# Altium PCB 2AM.PcbDoc
Units mm, origin at the board's own origin, x right, y up, seen from the top; angles counter-clockwise.
Board outline 55 x 105 mm, 2 copper layers (Top Layer, Bottom Layer); 52 components, 28 nets, 124 pads, 0 vias.
Unrouted connection lines stored in the file: 90.
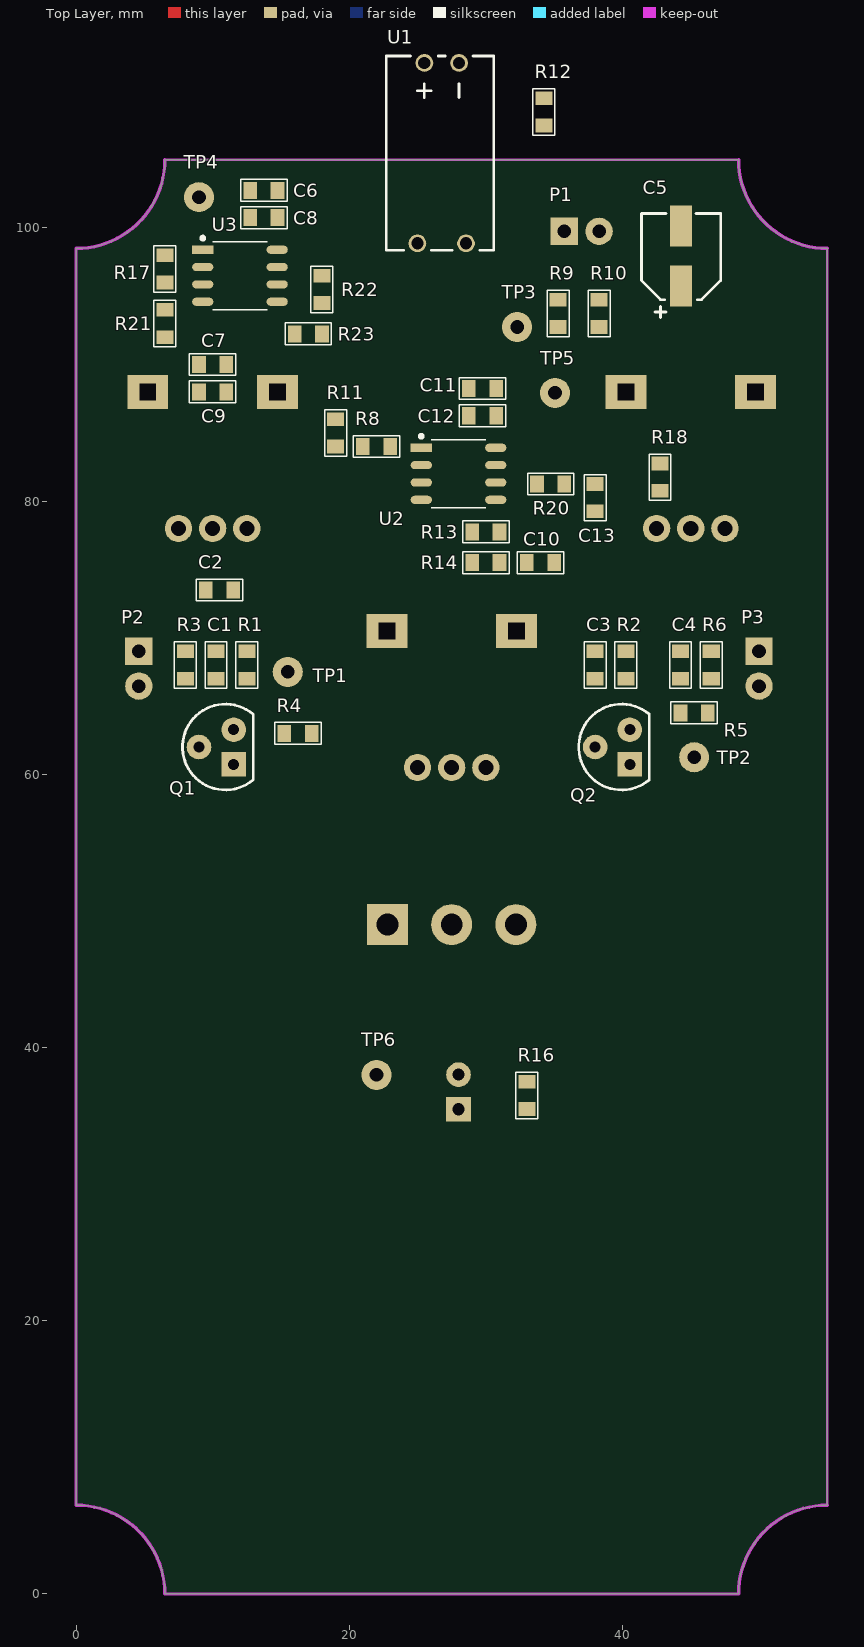
[diagram p0: Top Layer view]
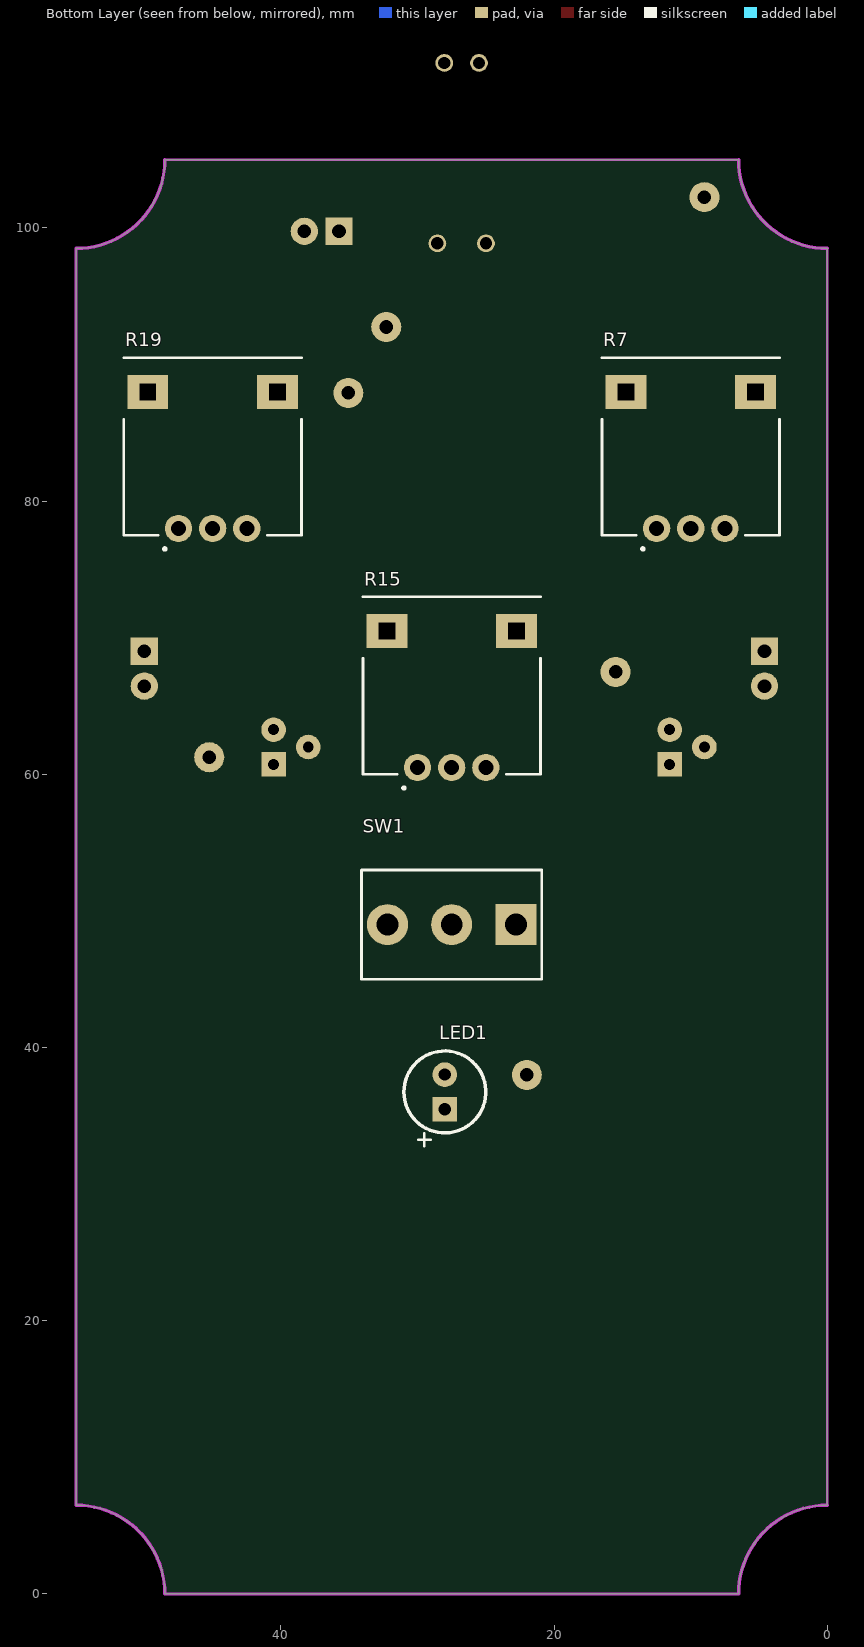
[diagram p1: Bottom Layer view, seen from below]

## Layer stack, top to bottom
Top Solder: solder mask 0.0102, Solder Resist, Dk 3.5
Top Layer: signal copper 0.0356
Dielectric 1: dielectric 0.32, FR-4, Dk 4.8
Bottom Layer: signal copper 0.0356
Bottom Solder: solder mask 0.0102, Solder Resist, Dk 3.5

## Board outline
0,6.5 cw(c0,0) 6.5,0 48.5,0 cw(c55,0) 55,6.5 55,98.5 cw(c55,105) 48.5,105 6.5,105 cw(c0,105) 0,98.5

## Design rules (kind name [scope] priority, off if disabled: settings)
Clearance [All] p1: gap=0.254 ignorepadtopadclearanceinfootprint=FALSE except(0: Arc-Hole Track-Hole SMDPad-Hole THPad-Hole Via-Hole Fill-Hole Poly-Hole Region-Hole Text-Hole)
Height [All] p1: minheight=0 maxheight=50 prefheight=12.7
PolygonConnect [All] p1: connectstyle=Relief reliefconductorwidth=0.254 reliefentries=4 polygonreliefangle="90 Angle" airgapwidth=0.254
RoutingVias [All] p1: holewidth=0.711 width=1.27 viastyle="Through Hole" minholewidth=0.711 minwidth=1.27 maxholewidth=0.711 maxwidth=1.27
SolderMaskExpansion [All] p1: expansion=0.102 istentingtop=FALSE
Width [All] p1: maxlimit=0.254 minlimit=0.254 preferedwidth=0.254
29 further rules are at their usual default settings.

## Components (designator, comment, footprint, x,y, rotation, side; value= is the part's Value field where it differs from the comment)
C1 "TH, cap" "0805, cap" 10.25,69 r270 top value=100n
C2 "TH, cap" "0805, cap" 9.5,73.5 r0 top value=1u
C3 "TH, cap" "0805, cap" 38,69 r270 top value=100n
C4 "TH, cap" "0805, cap" 44.25,67 r90 top value=100n
C5 "Capacitor, TH 2mm" "Cap, SMD, Polar, 5.3x5.3mm" 44.29,97.95 r180 top value=47u
C6 "TH, cap" "0805, cap" 12.75,102.75 r0 top value=1u
C7 "TH, cap" "0805, cap" 9,90 r0 top value=1u
C8 "TH, cap" "0805, cap" 12.75,100.75 r0 top value=100n
C9 "TH, cap" "0805, cap" 9,88 r0 top value=100n
C10 "TH, cap" "0805, cap" 35,75.5 r180 top value=100n
C11 "TH, cap" "0805, cap" 28.75,88.25 r0 top value=1u
C12 "TH, cap" "0805, cap" 28.75,86.25 r0 top value=100n
C13 "TH, cap" "0805, cap" 38,79.25 r90 top value=100n
LED1 "0805, LED" LED_Radial_5mm 28,36.75 r90 bottom value="0805 LED"
P1 "1x2 Pin Header" padtwo_L 35.75,99.75 r90 top
P2 "1x2 Pin Header" padtwo_L 4.6,69 r0 top
P3 "1x2 Pin Header" padtwo_L 50,69 r0 top
Q1 "BC547" BC547_TO-92_BENT 10.27,62 r180 top
Q2 "BC547" BC547_TO-92_BENT 39.27,62 r180 top
R1 "TH, resistor" 0805#1 12.5,69 r270 top value=470k
R2 "TH, resistor" 0805#1 40.25,69 r270 top value=470k
R3 "TH, resistor" 0805#2 8,67 r90 top value=1M
R4 "TH, resistor" 0805#1 15.25,63 r0 top value=10k
R5 "TH, resistor" 0805#1 44.25,64.5 r0 top value=10k
R6 "TH, resistor" 0805#1 46.5,69 r270 top value=470k
R7 "Potentiometer" RK097_15mm 12.5,78 r180 bottom locked value=A10k
R8 "TH, resistor" 0805#1 21,84 r0 top value=10k
R9 "TH, resistor" 0805#1 35.29,94.75 r270 top value=10k
R10 "TH, resistor" 0805#1 38.29,92.75 r90 top value=22k
R11 "TH, resistor" 0805#1 19,84 r90 top value=47k
R12 "TH, resistor" 0805#1 34.25,107.5 r90 top value=2k2
R13 "TH, resistor" 0805#1 29,77.75 r0 top value=47k
R14 "TH, resistor" 0805#1 29,75.5 r0 top value=470k
R15 "Potentiometer" RK097_15mm 30,60.5 r180 bottom locked value=B500k
R16 "TH, resistor" 0805#1 33,35.5 r90 top value=4k7
R17 "TH, resistor" 0805#1 6.5,98 r270 top value=100k
R18 "TH, resistor" 0805#1 42.75,80.75 r90 top value=1k
R19 "Potentiometer" RK097_15mm 47.5,78 r180 bottom locked value=A100k
R20 "TH, resistor" 0805#1 33.75,81.25 r0 top value=10k
R21 "TH, resistor" 0805#1 6.5,94 r270 top value=100k
R22 "TH, resistor" 0805#1 18,96.5 r270 top value=100k
R23 "TH, resistor" 0805#1 18,92.25 r180 top value=100k
SW1 "SPDT" SW_SPDT_SMTS-102-A2 27.5,49 r270 bottom
TP1 "Test Point" testPoint 15.5,67.5 r0 top value="Test point"
TP2 "Test Point" testPoint 45.25,61.25 r0 top value="Test point"
TP3 "Test Point" testPoint 32.29,92.75 r0 top value="Test point"
TP4 "Test Point" testPoint 9,102.25 r0 top value="Test point"
TP5 "Test Point" testPoint 35.067,87.924 r0 top value="Test point"
TP6 "Test Point" testPoint 22,38 r0 top value="Test point"
U1 "Optocoupler" "Optocoupler LED+LDR" 25.5,107 r270 top
U2 "LM358DR" SOIC8 28,82 r0 top
U3 "LM358DR" SOIC8 12,96.5 r0 top

## Footprints (in the part's own frame and the unit in brackets; to place one, negate y for a bottom-side part, rotate by r counter-clockwise, add the part's x,y. Pads: shape width x height; smd on the part's side, far side on the other; paste and mask are expansions set on the pad)
0805#1 [mm]
  rect 1x1.25 smd: 1(2,0) 2(0,0)
  silkscreen extent -0.7,-0.8 2.7,0.8, body extent 0.03,-0.62 2.03,0.63, height 0.5
0805#2 [mm]
  rect 1x1.25 smd: 1(0,0) 2(2,0)
  silkscreen extent -0.7,-0.8 2.7,0.8, body extent 0.03,-0.62 2.03,0.63, height 0.5
"0805, cap" [mm]
  rect 1x1.25 smd: 1(0,0) 2(2,0)
  silkscreen extent -0.7,-0.8 2.7,0.8, body extent -0.01,-0.62 1.99,0.63, height 0.8
BC547_TO-92_BENT [mm]
  rect 1.8x1.8 hole 0.8: 1(-1.27,1.27)
  round 1.8 hole 0.8: 2(1.27,0) 3(-1.27,-1.27)
  silkscreen extent -2.7,-3.14 2.47,3.14, body extent -2.67,-2.5 1.44,2.5, height 9.5
"Cap, SMD, Polar, 5.3x5.3mm" [mm] "Wurth WCAP-ASLI series"
  rect 1.6x3 smd: 1(0,-2.2) 2(0,2.2)
  silkscreen extent -2.9,-3.1 2.9,4.5, body extent -2.65,-2.95 2.65,2.95, height 5.41
LED_Radial_5mm [mm]
  round 1.8 hole 0.9: 0(1.27,0)
  rect 1.8x1.8 hole 0.9: 1(-1.27,0)
  silkscreen extent -3.95,-3 3,3, body extent -2.9,-2.9 2.5,2.9, height 8.72
"Optocoupler LED+LDR" [mm]
  round 1.3 hole 0.9 unplated mask+0.05: 3(8.128,-0.508) 4(8.128,3.048) A(-5.08,0) K(-5.08,2.54)
  silkscreen extent -5.59,-2.79 8.64,5.08, body extent -5.3,-2.54 8.35,4.96, height 7.75
padtwo_L [mm] "Pad Diameter 2 mm, Hole  0.3 mm, Pitch 2.54 mm"
  rect 2x2 hole 1: 1(0,0)
  round 2 hole 1: 2(0,-2.54)
  body extent -1.46,-3.81 1.46,1.27, height 8.51
RK097_15mm [mm] "Vertical Potentiometer"
  round 2 hole 1.1 unplated mask+0.05: 1(0,0) 2(2.5,0) 3(5,0)
  rect 3x2.5 hole 1.2 square unplated mask+0.05: MH(-2.25,10) MH(7.25,10)
  silkscreen extent -4,-1.6 9,12.5, body extent -3.55,-0.15 8.55,12.35, height 25.01
SOIC8 [mm] "SOIC, 8-Leads, Body 4,90x3,90mm, Pitch 1,27mm, IPC Medium Density"
  rect 1.55x0.6 smd: 1(-2.725,1.905)
  oval 1.55x0.6 smd: 2(-2.725,0.635) 3(-2.725,-0.635) 4(-2.725,-1.905) 5(2.725,-1.905) 6(2.725,-0.635) 7(2.725,0.635) 8(2.725,1.905)
  silkscreen extent -2.85,-2.5 2,2.88, body extent -3.03,-2.43 2.97,2.47, height 1.75
SW_SPDT_SMTS-102-A2 [mm]
  rect 3x3 hole 1.6: 1(0,4.7)
  round 3 hole 1.6: 2(0,0) 3(0,-4.7)
  silkscreen extent -4,-6.6 4,6.6, body extent -6,-6.6 6,6.79, height 30.13
testPoint [mm] "Diameter 2mm, Hole 0.3mm"
  round 2.2 hole 1: 0(0,0)
  body extent -1.27,-1.31 1.27,1.32, height 4.36

## Part data
C5: "Capacitor TH 3.5mm", Supplier Part Number 1=710-865080342006, Supplier 1=Mouser
P1 P2 P3: "2.54 mm, TH"
Q1 Q2: library part "NPN CBE"
SW1: library part "Switch SPDT", "Toggle switch SPDT"
U1: library part "Optocoupler LED+LDR"
U2 U3: "IC OPAMP GP 700KHZ 8SOIC", Case/Package=SOIC, Dual Supply Voltage=9V, Input Bias Current=250nA, Input Offset Voltage (Vos)=7mV, Manufacturer="Texas Instruments", Max Dual Supply Voltage=16V, Max Operating Temperature=70°C, Max Supply Voltage=32V, Min Dual Supply Voltage=1.5V, Min Operating Temperature=0°C, Min Supply Voltage=3V, Nominal Supply Current=1.2mA, Operating Supply Current=1mA, Output Current=30mA, Package Quantity=2500, Power Supply Rejection Ratio (PSRR)=65dB, Supplier Part Number 1=595-LM358DR, Voltage Gain=100dB, Amplifier Type="GENERAL PURPOSE", Bandwidth=700kHz, Category="Amplifiers - Op Amps, Buffer, Instrumentation", Common Mode Rejection Ratio=65dB, ComponentLink1Description=https://datasheet.ciiva.com/1795/lm358-1795488.pdf?src-supplier=Digi-Key, ComponentLink1URL=https://datasheet.ciiva.com/1795/lm358-1795488.pdf?src-supplier=Digi-Key, ComponentLink2Description=https://datasheet.ciiva.com/27056/2016330-27056228.pdf?src-supplier=Jameco, ComponentLink2URL=https://datasheet.ciiva.com/27056/2016330-27056228.pdf?src-supplier=Jameco, ComponentLink3Description=https://datasheet.ciiva.com/7709/1874566-7709823.pdf?src-supplier=Element14, ComponentLink3URL=https://datasheet.ciiva.com/7709/1874566-7709823.pdf?src-supplier=Element14, ComponentLink4Description=https://datasheet.ciiva.com/46385/1874566-46385851.pdf?src-supplier=Element14, ComponentLink4URL=https://datasheet.ciiva.com/46385/1874566-46385851.pdf?src-supplier=Element14, ComponentLink5Description=https://datasheet.ciiva.com/46390/1874566-46390414.pdf?src-supplier=Element14, ComponentLink5URL=https://datasheet.ciiva.com/46390/1874566-46390414.pdf?src-supplier=Element14, ComponentLink6Description=https://datasheet.ciiva.com/1795/lm358-1795487.pdf?src-supplier=Digi-Key, ComponentLink6URL=https://datasheet.ciiva.com/1795/lm358-1795487.pdf?src-supplier=Digi-Key, ComponentLink7Description=https://datasheet.ciiva.com/1795/lm358-1795489.pdf?src-supplier=Digi-Key, ComponentLink7URL=https://datasheet.ciiva.com/1795/lm358-1795489.pdf?src-supplier=Digi-Key, ComponentLink8Description=https://datasheet.ciiva.com/2973/lm358a-2973386.pdf?src-supplier=Avnet, ComponentLink8URL=https://datasheet.ciiva.com/2973/lm358a-2973386.pdf?src-supplier=Avnet, Contact Plating=Gold, Gain Bandwidth Product=700kHz, Height=1.58mm, Lead Free="Lead Free", Length=4.9mm, Manufacturer Part Number=LM358DR, Mounting Technology="Surface Mount", Number of Amplifiers=2, Number of Channels=2, Number of Circuits=2, Number of Elements=2, Operating Supply Voltage=16V, Output Current per Channel=30mA, Packaging="Tape and Reel", Pins=8, Pricing 1="1=0,37000, 10=0,29900, 50=0,29900, 100=0,18500, 1000=0,11500, 10000=0,10400 (USD)", Radiation Hardening=No, Reach SVHC Compliant=Yes, RoHS=Yes, RoHS Compliant=Yes, Series=-, Slew Rate=0.3V/µs, Stock 1=281120, Supplier 1=Mouser, Supply Current=1.2mA, Technology=BIPOLAR, Unity Gain Bandwidth Product=700kHz, Width=3.91mm
C1 C2 C3 C4 C6 C7 C8 C9 C10 C11 C12 C13: Supplier=Farnell
R7 R15 R19: ELFA=300-08-353
TP1 TP2 TP3 TP4 TP5 TP6: Farnell=1702006

## Nets (pads, with @x,y where several pads share a name; then routed paths per layer and width w, separated by ;. In a path a pad name is that pad's centre, name@x,y a point inside that pad or via, vN(x,y) a via of type N, cw(c..) or ccw(c..) an arc to the next point about the centre after c; other vN are vias at no path point)
4V5: C7.2 C9.2 R11.1 TP4.0 U3.1 U3.2
9V: C6.2 C8.2 C11.2 C12.2 P1.1 Q1.1 Q2.1 R9.2 R16.1 R17.2 R22.2 U2.8 U3.8
GND: C5.1 C6.1 C7.1 C8.1 C9.1 C10.1 C11.1 C12.1 C13.1 P1.2 P2.2 P3.2 R3.1 R4.1 R5.1 R6.1 R10.1 R21.1 R23.1 U1.3 U1.K U2.4 U3.4
InBufIn: C1.2 Q1.2 R1.1
InBufOut: C2.2 Q1.3 R4.2 TP1.0
NetC2_1: C2.1 R7.3
NetC3_1: C3.1 R7.2
NetC13_2: C13.2 R20.1
NetLED1_1: LED1.1 R16.2
NetR7_1: R7.1 U1.4
NetR12_1: R12.1 U1.A
NetR13_2: R13.2 SW1.1
NetR14_2: R14.2 SW1.3
NetR15_2: R15.2 R15.3 SW1.2
NetR17_1: R17.1 R21.2 U3.3
NetR18_1: R18.1 R20.2 U2.6
NetR18_2: R18.2 R19.2 R19.3
NetR22_1: R22.1 R23.2 U3.5
NetU3_6: U3.6 U3.7
OscBias: R8.2 R11.2 U2.3
OscOut: R8.1 R15.1 TP5.0 U2.1
OscTriangleOut: C10.2 R13.1 R14.1 U2.2 U2.5
OutBufIn: C3.2 Q2.2 R2.1 TP2.0
OutBufOut: C4.1 Q2.3 R5.2
SigInput: C1.1 P2.1 R3.2
SigOutput: C4.2 P3.1 R6.2
Vbias: C5.2 R1.2 R2.2 R9.1 R10.2 TP3.0
WaveBufOut: LED1.0 R12.2 R19.1 TP6.0 U2.7
pads on no net: R7.MH R15.MH R19.MH

## Keep-outs
Keep-Out Layer:
  the board outline again, w0.254